# Altium PCB CH32V305F-R0-1v0.PcbDoc
Units mil, origin at the board's own origin, x right, y up, seen from the top; angles counter-clockwise.
Board outline 1496.06 x 2204.72 mil, 2 copper layers (Top Layer, Bottom Layer); 26 components, 30 nets, 117 pads, 268 vias.
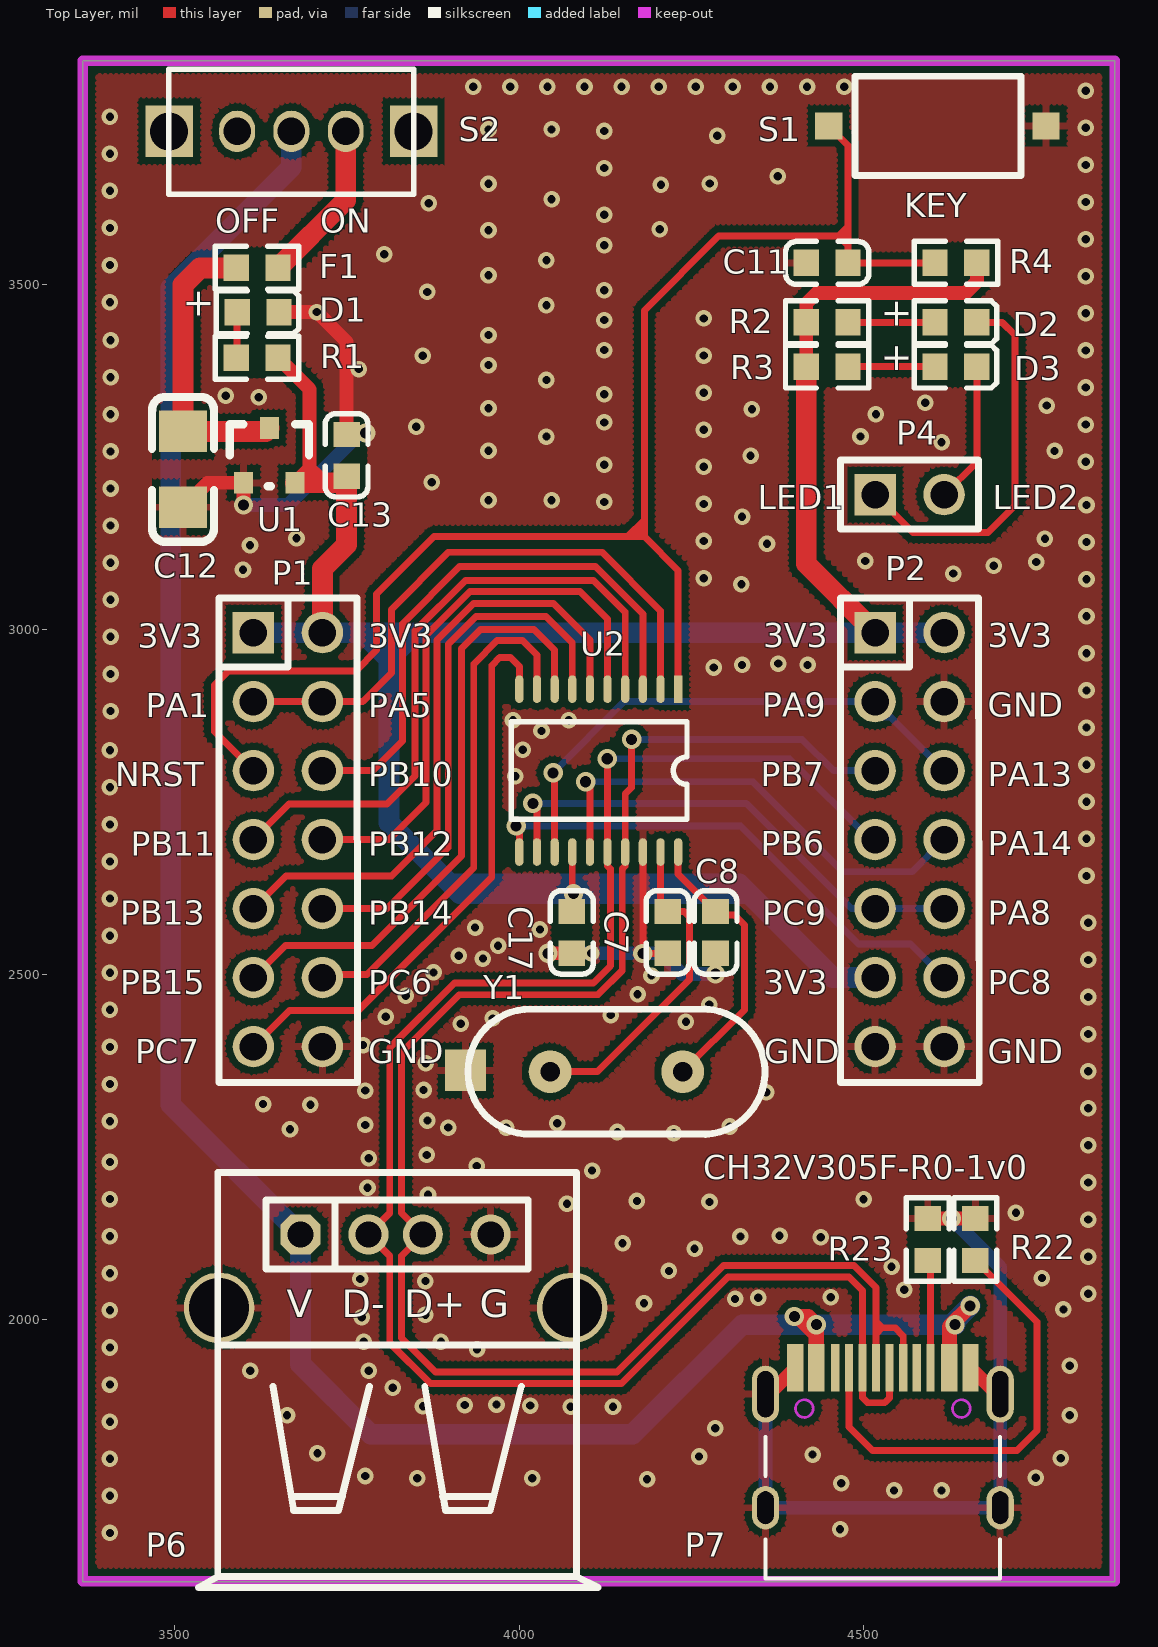
[diagram p0: Top Layer view]
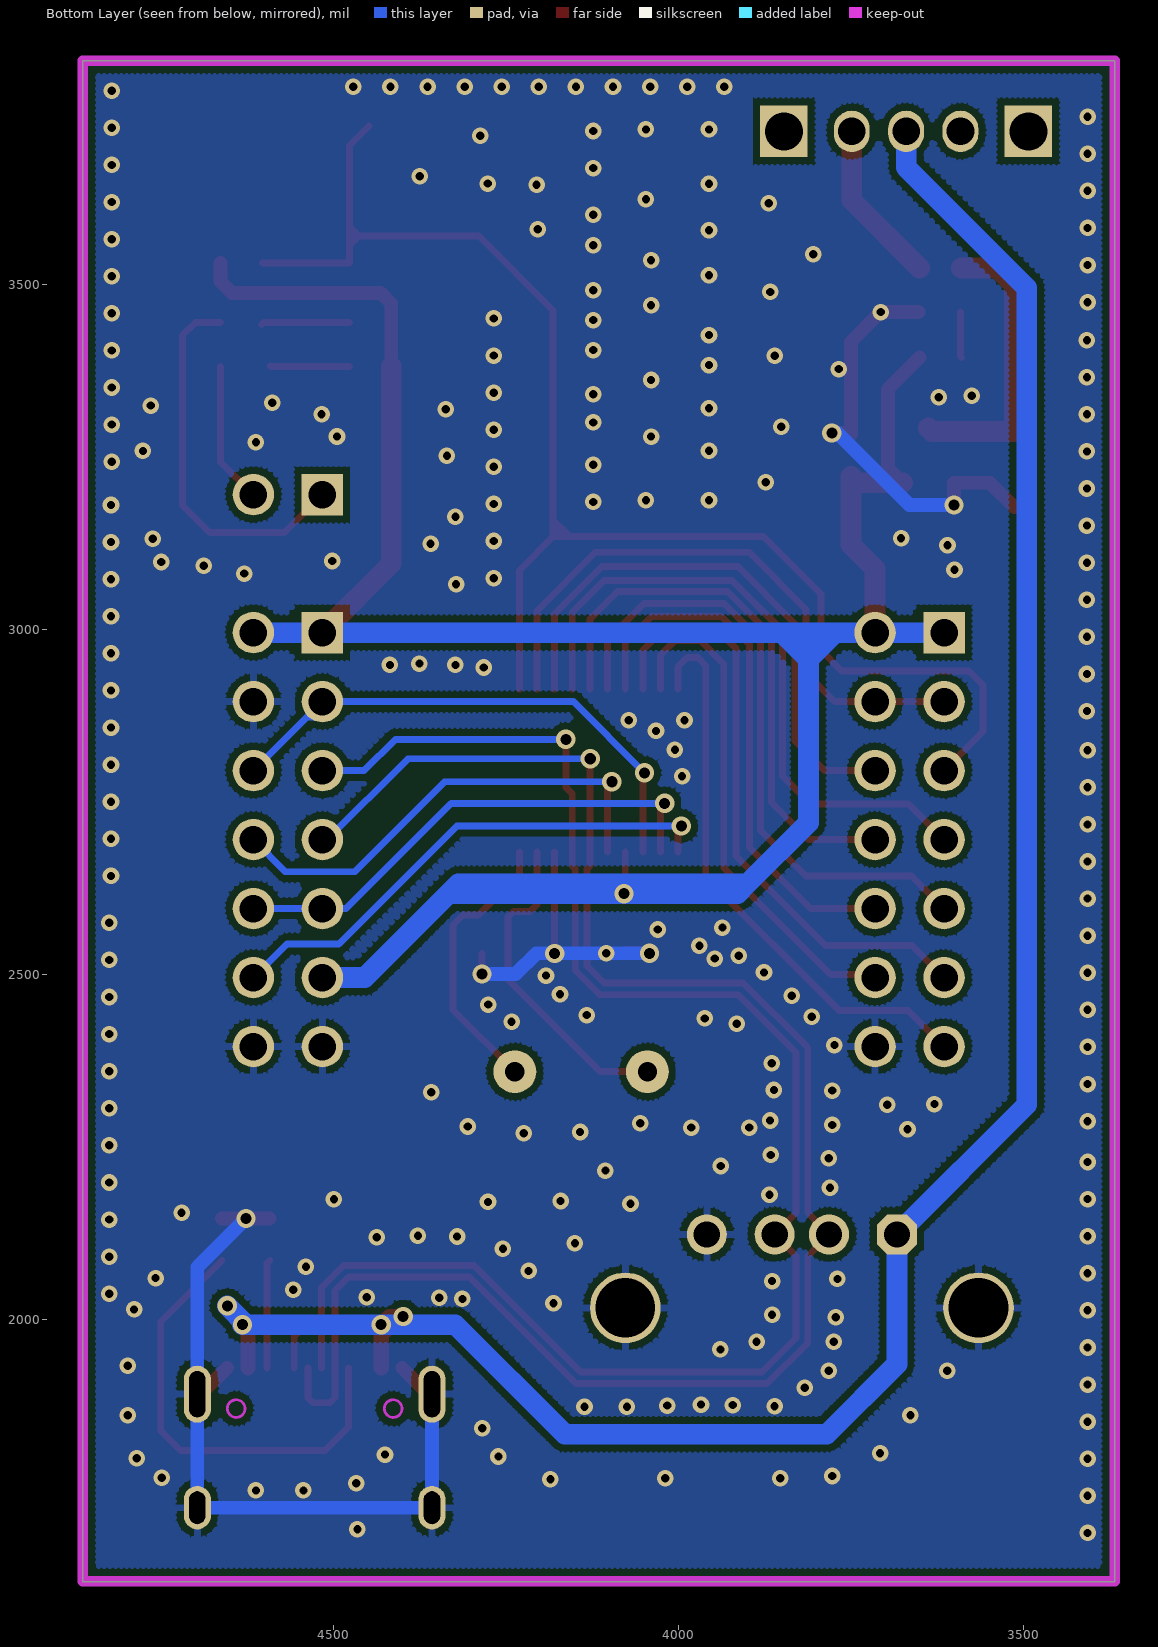
[diagram p1: Bottom Layer view, seen from below]

## Layer stack, top to bottom
Top Solder: solder mask 0.4, Solder Resist, Dk 3.5
Top Layer: signal copper 1.4
Dielectric 1: dielectric 12.6, FR-4, Dk 4.8
Bottom Layer: signal copper 1.4
Bottom Solder: solder mask 0.4, Solder Resist, Dk 3.5

## Board outline
3367.52,1619.63 4863.58,1619.63 4863.58,3824.35 3367.52,3824.35

## Design rules (kind name [scope] priority, off if disabled: settings)
Clearance Clearance_1 [InPolygon] p1: gap=10 ignorepadtopadclearanceinfootprint=FALSE
Clearance [All] p2: gap=6 ignorepadtopadclearanceinfootprint=FALSE
ComponentClearance [All] p1 off: gap=10 collisioncheckmode=3 verticalgap=10 showdistances=FALSE
DiffPairsRouting [All] p1: maxlimit=10 minlimit=7 mostfreqgap=8 toplayer_minwidth=6 toplayer_maxwidth=15 toplayer_prefwidth=8 bottomlayer_minwidth=6 bottomlayer_maxwidth=15 bottomlayer_prefwidth=8 maxuncoupledlength=500
MinimumSolderMaskSliver [All] p1 off: minsoldermaskwidth=10
PolygonConnect PolygonConnect_1 [IsVia] p1: connectstyle=Direct reliefconductorwidth=10 reliefentries=4 polygonreliefangle="90 Angle" airgapwidth=10
PolygonConnect [All] p2: connectstyle=Relief reliefconductorwidth=10 reliefentries=4 polygonreliefangle="90 Angle" airgapwidth=10
RoutingVias [All] p1: holewidth=16 width=28 viastyle="Through Hole" minholewidth=12 minwidth=24 maxholewidth=28 maxwidth=50
SilkToSilkClearance [All] p1 off: silktosilkclearance=10
SilkToSolderMaskClearance [IsPad] p1 off: minsilkscreentomaskgap=10 clearancetoexposedcopper=TRUE
SolderMaskExpansion [All] p1: expansion=4 istentingtop=FALSE
Width [All] p1: maxlimit=100 minlimit=6 preferedwidth=10
25 further rules are at their usual default settings.

## Classes and differential pairs
differential pair NewDifferentialPair1: +PB6 -PB7

## Components (designator, comment, footprint, x,y, rotation, side; value= is the part's Value field where it differs from the comment)
C7 "22pF" 0603_C 4215.34,2530.51 r90 top
C8 "22pF" 0603_C 4284.82,2530.51 r90 top
C11 "0.1uF" 0603_C 4416.37,3531.25 r0 top
C12 "10uF" 3216_C 3513,3287 r90 top
C13 "2.2uF" 0603_C 3750,3282.63 r270 top
C17 "0.1uF" 0603_C 4076.48,2530.51 r90 top value=15pF
D1 "POWER  red" 0603+ 3591.38,3460 r0 top
D2 "LED1" 0603+ 4603,3445 r0 top
D3 "LED2" 0603+ 4603,3381 r0 top
F1 "500mA" 0603 3650.63,3524 r180 top
P1 "HEADER 7x2" IDC14-2.54mm 3615,2995.32 r0 top
P2 "HEADER 7x2" IDC14-2.54mm 4516.1,2995.32 r0 top
P4 "2HEAD" SIP2-2.54mm 4516.1,3195.32 r270 top
P6 "USB_A" USBAF 3683.29,2122.94 r0 top (schematic designator P_HUSB0)
P7 "TYPE-C" TYPE-C-Receptacle-2.0 4527.34,1929.63 r0 top (schematic designator P_HUSB1)
R1 "1K" 0603 3590,3394 r0 top
R2 "1K" 0603 4416.37,3445 r0 top
R3 "1K" 0603 4416.37,3381 r0 top
R4 "10K" 0603 4603,3531.25 r0 top
R22 "NC(5.1K)" 0603 4661.54,2085.36 r90 top
R23 "NC(5.1K)" 0603 4592.36,2085.36 r90 top
S1 "KEY" SMD_6.1x3.65x2.5mm-KEY 4448.82,3729.91 r0 top
S2 "SW" KEY2 3670,3722 r0 top
U1 "6219" SOT-23 3600.6,3212.47 r0 top
U2 "CH32V305F" TSSOP20 4230.7,2913.32 r180 top
Y1 "8M" XT_AT49 4237.15,2358.91 r90 top

## Footprints (in the part's own frame and the unit in brackets; to place one, negate y for a bottom-side part, rotate by r counter-clockwise, add the part's x,y. Pads: shape width x height; smd on the part's side, far side on the other; paste and mask are expansions set on the pad)
0603 [mm]
  rect 0.93x0.98 smd: 1(0,0) 2(1.54,0)
  silkscreen extent -0.76,-0.79 2.3,0.79
0603+ [mm]
  rect 0.93x0.98 smd: 1(0,0) 2(1.54,0)
  silkscreen extent -0.76,-0.79 2.27,0.79
0603_C [mm]
  rect 0.93x0.98 smd: 1(0,0) 2(1.54,0)
  silkscreen extent -0.76,-0.79 2.31,0.79
3216_C [mil]
  rect 60x70 smd: 1(0,0) 2(-110,0)
  silkscreen extent -160,-45 50,45
IDC14-2.54mm [mil]
  rect 60x60 hole 40: 1(0,0)
  round 60 hole 40: 2(100,0) 3(0,-100) 4(100,-100) 5(0,-200) 6(100,-200) 7(0,-300) 8(100,-300) 9(0,-400) 10(100,-400) 11(0,-500) 12(100,-500) 13(0,-600) 14(100,-600)
  silkscreen extent -50,-652 151,50
KEY2 [mm]
  rect 1.75x1.9 hole 1.4: 0(-4.5,0) 0(4.5,0)
  oval 1.321x1.524 hole 1.016: 1(0,0) 2(-2,0) 3(2,0)
  silkscreen extent -4.51,-2.31 4.5,2.29
SIP2-2.54mm [mil]
  rect 60x60 hole 40: 1(0,0)
  round 60 hole 40: 2(0,100)
  silkscreen extent -50,-50 50,150
SMD_6.1x3.65x2.5mm-KEY [mm]
  rect 1x1 smd: 1(0,0) 2(8,0)
  silkscreen extent 0.98,-1.83 7.08,1.83
SOT-23 [mm]
  rect 0.7x0.8 smd: 1(0,0) 2(1.9,0) 3(0.95,2.02)
  silkscreen extent -0.51,-0.13 2.41,2.16
TSSOP20 [mil]
  rect 12x40 smd: 1(0,0)
  oval 12x40 smd: 2(25.6,0) 3(51.2,0) 4(76.8,0) 5(102.4,0) 6(128,0) 7(153.5,0) 8(179.1,0) 9(204.7,0) 10(230.3,0) 11(230.3,236) 12(204.7,236) 13(179.1,236) 14(153.5,236) 15(128,236) 16(102.4,236) 17(76.8,236) 18(51.2,236) 19(25.6,236) 20(0,236)
  silkscreen extent -13,47 242,189
TYPE-C-Receptacle-2.0 [mm]
  oval 1x1.6 hole 0.6 slot 1.2 at 90 deg: 0(-4.32,-5.15) 0(4.32,-5.15)
  oval 1x2.1 hole 0.6 slot 1.7 at 90 deg: 0(-4.32,-0.97) 0(4.32,-0.97)
  rect 0.6x1.75 smd: A1(-3.225,0) A4(-2.45,0) B1(3.225,0) B4(2.45,0)
  rect 0.3x1.75 smd: A5(-1.25,0) A6(-0.25,0) A7(0.25,0) A8(1.25,0) B5(1.75,0) B6(0.75,0) B7(-0.75,0) B8(-1.75,0)
  Keep-Out Layer circle w0.1: c-2.89,-1.5 r0.325
  Keep-Out Layer circle w0.1: c2.89,-1.5 r0.325
  silkscreen extent -4.32,-7.75 4.32,-2.55
USBAF [mm]
  round 2.6 hole 2.2: 0(-3,-2.7) 0(10,-2.7)
  oct 1.473x1.473 hole 0.965: 1(0,0)
  round 1.473 hole 0.965: 2(2.5,0) 3(4.5,0) 4(7,0)
  silkscreen extent -3.75,-12.99 10.95,2.29
XT_AT49 [mil]
  rect 60x60 smd: 0(1.89,314.81)
  round 62 hole 28: 1(0,0) 2(0,192.13)
  silkscreen extent -91,-119 91,311

## Part data
C7 C8 C11 C17: library part Cap, "Capacitor", LatestRevisionDate=17-Jul-2002, LatestRevisionNote="Re-released for DXP Platform.", PackageReference=RAD-0.3, Published=8-Jun-2000, Publisher="Altium Limited"
C12 C13: library part CAP, "Capacitor"
D1 D2 D3: library part LED0, "Typical INFRARED GaAs LED", LatestRevisionDate=08-Jul-2005, LatestRevisionNote="Mech Layer 1 removed.", PackageReference=LED-0, Published=8-Jun-2000, Publisher="Altium Limited"
F1: library part FUSE1, "Fuse"
P1 P2: library part "Header 7X2", "Header, 7-Pin, Dual row"
P6: library part USB, "USB Port"
P7: library part TYPE-C1
R1 R2 R3: library part "Res Semi", "Semiconductor Resistor", LatestRevisionDate=17-Jul-2002, LatestRevisionNote="Re-released for DXP Platform.", PackageReference=AXIAL-0.5, Published=8-Jun-2000, Publisher="Altium Limited"
R4 R22 R23: library part Res2, "Resistor"
  R4: LatestRevisionDate=17-Jul-2002, LatestRevisionNote="Re-released for DXP Platform.", PackageReference=AXIAL-0.4, Published=8-Jun-2000, Publisher="Altium Limited"
U1: library part LM1117_3.3V
U2: "RISC-V FPU HD-MCU, 144MHz, USB_480M, CAN, UART*2, SPI"
Y1: library part XTAL, "Crystal Oscillator", LatestRevisionDate=17-Jul-2002, LatestRevisionNote="Re-released for DXP Platform.", PackageReference=R38, Published=8-Jun-2000, Publisher="Altium Limited"

## Via types
v1: diameter 24, hole 12, Top Layer to Bottom Layer, tented both sides, 251 vias
v2: diameter 28, hole 16, Top Layer to Bottom Layer, tented both sides, 17 vias

## Nets (pads, with @x,y where several pads share a name; then routed paths per layer and width w, separated by ;. In a path a pad name is that pad's centre, name@x,y a point inside that pad or via, vN(x,y) a via of type N, cw(c..) or ccw(c..) an arc to the next point about the centre after c; other vN are vias at no path point)
+5V: P6.1 P7.A4 P7.B4 S2.1 | length 3283.1
  Top Layer w22: v2(4399,2004) v2@4404.36,2004 ; P7.A4 4430.88,1977.48 ; P7.B4 v2@4623.8,1984.15 ; v2(4631.87,1992.22) v2@4623.8,1984.15 ; v2(4653.99,2019.48) 4623.8,1989.29 v2@4623.8,1984.15 ; v2@4404.36,2004 4430.88,1977.48 ; v2@4404.36,2004 4419.11,2004 v2(4430.88,1992.22) 4430.88,1977.48
  Bottom Layer w30: S2.1 3670,3669.83 3495.11,3494.94 3495.11,2311.12 P6.1 3683.29,1935.05 3785.07,1833.28 4164.57,1833.28 4323.52,1992.22 v2(4430.88,1992.22) v2@4626.73,1992.22 ; v2(4631.87,1992.22) v2@4626.73,1992.22 ; v2(4653.99,2019.48) v2@4626.73,1992.22
GND: C7.1 C8.1 C11.1 C12.2 C13.1 C17.1 D1.2 P1.14 P2.4 P2.13 P2.14 P6.0 P6.4 P7.0 P7.A1 P7.B1 R22.2 R23.2 S1.2 U1.1 U2.18 Y1.0 | length 2276.5
  Top Layer w10: U2.18 v2(4179.5,2530.33) 4179.68,2530.51 C7.1 ; v2(4284.82,2500.39) C8.1
  Top Layer w20: C12.2 3548.47,3212.47 U1.1 v2(3600.6,3180.43) ; D1.2 v1(3706.97,3460) 3750,3416.97 C13.1 3752.13,3284.76 v2(3777.75,3284.76) ; v2(4041.93,2530.51) C17.1 ; P7.0@4357.26,1891.44 4362.18,1891.44 P7.A1 ; R23.2 v2(4626.95,2145.99) R22.2 ; P7.B1 4692.5,1891.44 P7.0@4697.42,1891.44
  Bottom Layer w20: v2(3600.6,3180.43) 3665.18,3180.43 3769.51,3284.76 v2(3777.75,3284.76) ; v2(4041.93,2530.51) 4206.05,2530.51 4236.16,2500.39 v2(4284.82,2500.39) ; P7.0@4357.26,1891.44 4357.26,1726.87 4697.42,1726.87 4697.42,1891.44 4697.42,2075.53 v2(4626.95,2145.99)
  other v1: 3407.04,1690.31 4465.34,1695.64 3407.04,1744.08 4543.62,1751.94 4612.46,1751.94 4466.99,1762.33 4185.56,1768.14 3852.38,1769.71 4018.97,1769.71 4748.84,1770.13 3776.94,1772.85 3407.04,1797.85 4785.21,1798.7 4261,1801.14 4425.42,1803.9 3707.79,1805.86 4284.57,1842.01 3407.04,1851.62 3663.79,1860.87 4798.19,1861.05 4074.74,1873.41 4136.2,1873.41 3860.73,1874.15 4016.24,1874.89 3921.45,1875.63 3967.36,1876.37 3817.04,1900.81 3407.04,1905.38 3610.35,1925.3 3782.23,1925.25 4798.19,1932.48 3939.22,1956.35 3407.04,1959.15 3774.83,1967.46 3886.83,1967.45 3771.87,2003 3864.35,2006.56 3407.04,2012.92 4789.1,2014.31 4181.15,2023.18 4313.18,2029.56 4346.82,2031.26 4451.76,2031.81 4825.25,2037.02 4558.57,2042.73 3864.35,2055.45 3769.64,2058.54 4757.93,2059.77 3407.04,2066.68 4217.33,2070.11 4539.99,2075.98 4825.25,2090.78 4254.48,2102.38 4150.06,2110.43 4437.33,2119 3407.04,2120.45 4320.97,2119.98 4377.68,2120.96 4825.25,2144.55 4720.26,2154.59 4069.54,2167.58 4276.05,2170.18 4170.85,2171.47 3407.04,2174.22 4499.46,2174.07 3868.01,2180.38 3780.37,2190.83 4825.25,2198.32 4105.9,2215.64 3938.77,2222.19 3407.04,2227.98 3781.98,2233.45 3866.4,2238.27 4825.25,2252.09 4224.21,2269.63 4142.67,2271.48 3668.01,2275.32 3897.36,2277.89 3981.53,2277.89 4305.4,2279.5 3777.15,2281.69 4055.36,2284.1 3407.04,2287.23 3867.21,2288.12 4825.25,2305.85 3697.56,2310.79 3629,2311.97 4358.31,2329.2 3777.15,2331.54 3861.58,2332.35 3407.04,2341 4825.25,2359.62 3864.8,2370.94 3407.04,2394.77 3773.94,2397.47 4825.25,2413.39 3915.4,2428.39 4241.9,2431.24 3961.94,2436.06 3806.9,2438.48 4132.96,2440.99 3407.04,2448.53 4275.67,2456.17 4825.25,2467.15 3835.85,2469.03 4171.76,2471.04 4192,2498.2 3407.04,2502.3 3876.05,2502.81 4825.25,2520.92 3947.61,2522.91 3912.75,2526.78 4104.77,2530.51 3969.58,2541.53 3407.04,2556.07 4030.23,2565.03 3936.24,2567.76 4825.25,2574.69 3407.04,2609.83 4822.57,2642.7 3407.04,2663.6 4822.57,2696.47 3407.04,2717.37 4822.57,2750.23 3407.04,2771.14 3994.73,2787.16 4822.57,2804 3407.04,2824.9 4005.18,2825.5 4032.57,2852.88 4822.57,2857.77 3991.24,2868.32 4071.9,2868.32 3407.88,2881.63 4822.57,2911.53 3407.88,2935.4 4282.43,2944.75 4323.28,2948.55 4418.29,2948.55 4375.54,2950.45 4822.57,2965.3 3407.88,2989.17 4822.57,3019.07 3407.88,3042.93 4322.33,3065.41 4822.57,3072.83 4267.81,3074.35 4629.3,3080.95 3599.87,3086.38 4688.07,3092.15 3407.88,3096.7 4749.64,3097.74 4501.95,3099.14 3610.04,3121.96 4359.38,3124.31 4822.57,3126.6 4267.81,3128.11 4762.24,3131.33 3677.39,3132.13 3407.88,3150.47 4323.28,3163.26 4822.57,3180.37 4267.81,3181.88 4123.59,3184.77 3955.77,3187.03 4047.19,3187.03 3407.88,3204.23 3873.66,3213.49 4267.81,3235.65 4123.59,3238.54 4821.41,3243.11 4335.63,3251.62 3407.88,3258 3955.77,3259.03 4776.23,3258.67 4612.5,3271.27 4039.68,3279.53 4494.96,3279.66 4267.81,3289.41 3851.2,3293.84 4821.41,3296.87 4123.59,3300.02 3407.88,3311.77 4517.35,3311.85 4337.53,3319.08 3955.77,3320.52 4765.04,3324.44 4588.71,3328.64 3622.65,3336.44 3574.87,3338.51 4123.59,3341.01 4267.81,3343.18 4821.41,3350.64 4039.68,3361.5 3407.88,3365.54 3767.63,3377.41 3955.77,3383.21 3860.55,3396.69 4267.81,3396.95 4821.41,3404.41 4123.59,3404.92 3407.88,3419.3 3955.77,3426.63 4123.59,3448.34 4267.81,3450.71 4821.41,3458.17 4039.68,3470.05 3407.04,3474.35 3866.78,3489.14 4123.59,3491.76 4821.41,3511.94 3955.77,3513.47 3407.04,3528.12 4039.68,3535.18 3804.48,3543.9 4123.59,3556.89 4821.41,3565.71 3955.77,3578.6 4204.16,3580.07 3407.04,3581.89 4123.59,3601.12 3869.3,3617.61 4821.41,3619.47 4047.19,3623.64 3407.04,3635.66 4205.7,3644.65 3955.77,3646.16 4276.44,3646.19 4374.86,3656.96 4123.59,3668.68 4821.41,3673.24 3407.04,3689.42 4287.2,3715.39 4123.59,3722.44 3955.77,3724.7 4047.19,3724.7 4821.41,3727.01 3407.04,3743.19 4821.41,3780.77 3933.57,3786.47 3987.33,3786.47 4041.1,3786.47 4094.87,3786.47 4148.63,3786.47 4202.4,3786.47 4256.17,3786.47 4309.94,3786.47 4363.7,3786.47 4417.47,3786.47 4471.24,3786.47
LED1: D2.2 P4.1 | length 551.7
  Top Layer w10: P4.1 4570.95,3140.47 4679.92,3140.47 4718.99,3179.54 4718.99,3426.43 4700.42,3445 D2.2
LED2: D3.2 P4.2 | length 205.4
  Top Layer w10: P4.2 4663.63,3242.85 D3.2
NetD1_1: D1.1 R1.1 | length 66.6
  Top Layer w10: R1.1 3591.38,3395.38 D1.1
NetD2_1: D2.1 R2.2 | length 128.6
  Top Layer w10: R2.2 4601.31,3445 D2.1@4604.34,3441.96
NetD3_1: D3.1 R3.2 | length 114.7
  Top Layer w10: R3.2 4590.45,3381 D3.1@4591.36,3381.91
NetF1_1: F1.1 S2.3 | length 238.6
  Top Layer w30: F1.1 3748.74,3622.11 S2.3
NetP7_A5: P7.A5 R22.1 | length 667.7
  Top Layer w10: P7.A5 4478.13,1843.99 4512.32,1809.79 4721.62,1809.79 4750.51,1838.69 4750.51,1996.39 R22.1
NetP7_B5: P7.B5 R23.1 | length 157.3
  Top Layer w10: R23.1 4596.24,2081.49 P7.B5
NRST: C11.2 P1.5 R4.1 S1.1 U2.1 | length 2246.4
  Top Layer w10: P1.5 3558.64,2851.69 3558.64,2919.42 3579.19,2939.97 3763.57,2939.97 3793.53,2969.92 3793.53,3051.34 3876.85,3134.66 4157.45,3134.66 ; U2.1 4230.7,3085.62 4181.66,3134.66 ; S1.1 4477,3701.73 4477,3584.02 ; R4.1 C11.2 4477,3556.36 ; 4157.45,3134.66 4167.52,3134.66 ; 4157.45,3134.66 4181.66,3158.88 ; 4167.52,3134.66 4181.66,3134.66 ; 4167.52,3134.66 4181.66,3148.8 ; 4181.66,3134.66 4181.66,3148.8 ; 4181.66,3148.8 4181.66,3158.88 ; 4181.66,3158.88 4181.66,3462.4 4289.46,3570.19 4463.17,3570.19 ; 4463.17,3570.19 4477,3556.36 ; 4463.17,3570.19 4477,3570.19 ; 4463.17,3570.19 4477,3584.02 ; 4477,3556.36 4477,3570.19 ; 4477,3570.19 4477,3584.02
PA1: P1.3 P1.4 U2.2 | length 882.6
  Top Layer w10: P1.3 P1.4 3773.51,2895.32 3815.12,2936.93 3815.12,3029.01 3897.99,3111.88 4120.24,3111.88 4205.1,3027.01 U2.2
PA8: P2.9 P2.10 U2.12 | length 732.3
  Top Layer w10: v2(4019.96,2747.8) 4026,2741.76 U2.12
  Bottom Layer w10: v2(4019.96,2747.8) 4160.65,2747.8 4329.38,2747.8 4481.86,2595.32 P2.9 P2.10
PA9: P2.3 P2.6 U2.13 | length 758.6
  Top Layer w10: v2(4049.37,2792.03) 4049.13,2792.28 4048.7,2791.85 4051.6,2788.95 U2.13
  Bottom Layer w10: v2(4049.37,2792.03) 4049.76,2792.41 4049.76,2792.7 4152.38,2895.32 P2.3 ; P2.3@4516.1,2873.18 4538.24,2873.18 P2.6
PA14: P2.8 U2.15 | length 718.7
  Top Layer w10: v2(4096.52,2779.16) 4102.7,2785.34 U2.15
  Bottom Layer w10: v2@4092.28,2781.64 cw(c4093.01,2781.64) 4093.52,2782.16 v2(4096.52,2779.16) ; v2@4093.52,2779.16 4338.86,2779.16 4469.34,2648.68 4569.46,2648.68 P2.8
PB6: P2.7 P6.2 P7.A7 P7.B7 U2.16 | length 2587.2
  Top Layer w10: v2(4127.87,2812.49) 4127.87,2801.9 4128.3,2801.47 U2.16 4128.3,2657.32 4132.6,2653.02 4132.6,2512.45 4107.62,2487.47 3906.39,2487.47 3812.59,2393.66 3812.59,2153.81 P6.2 3812.59,2092.07 3812.59,1965.88 3871.73,1906.74 4148.77,1906.74 4303.18,2061.15 4478.24,2061.15 4497.81,2041.58 P7.B7 4497.81,1886.3 4505.06,1879.05 4530.13,1879.05 4537.18,1886.1 P7.A7
  Bottom Layer w10: v2(4127.87,2812.49) 4392.13,2812.49 4509.3,2695.32 P2.7
PB7: P2.5 P6.3 P7.A6 P7.B6 U2.17 | length 2538.6
  Top Layer w10: v2(4163.26,2840.63) 4163.26,2770.53 4153.9,2761.18 U2.17 4153.9,2657.32 4149.6,2653.02 4149.6,2505.41 4114.66,2470.47 3913.43,2470.47 3829.59,2386.62 3829.59,2153.81 P6.3 3829.59,2092.07 3829.59,1972.92 3878.77,1923.74 4141.73,1923.74 4296.14,2078.15 4485.28,2078.15 4517.5,2045.93 4517.5,1996.64 ; P7.A6 4517.5,1978.92 ; P7.B6 4556.87,1976.02 4545.11,1987.78 4526.36,1987.78 ; 4517.5,1978.92 4517.5,1987.78 ; 4517.5,1978.92 4526.36,1987.78 ; 4517.5,1987.78 4517.5,1996.64 ; 4517.5,1987.78 4526.36,1987.78 ; 4517.5,1996.64 4526.36,1987.78
  Bottom Layer w10: v2(4163.26,2840.63) 4410.39,2840.63 4455.7,2795.32 P2.5
PB10: P1.6 U2.3 | length 824
  Top Layer w10: P1.6 3788.33,2795.32 3831.12,2838.11 3831.12,3008.14 3913.98,3091 4110.84,3091 4179.5,3022.34 U2.3
PB11: P1.7 U2.4 | length 948.8
  Top Layer w10: P1.7 3666.69,2747.01 3808.87,2747.01 3849.33,2787.47 3849.33,2978.1 3849.33,2998.06 3922.27,3071.01 4108.21,3071.01 4153.9,3025.32 U2.4
PB12: P1.8 U2.5 | length 822.5
  Top Layer w10: P1.8 3811.69,2695.32 3865.33,2748.96 3865.33,2971.47 3865.33,2991.44 3928.9,3055.01 4088.14,3055.01 4128.3,3014.84 U2.5
PB13: P1.9 U2.6 | length 926.1
  Top Layer w10: P1.9 3662.46,2642.79 3815.45,2642.79 3881.33,2708.66 3881.33,2752.95 3881.33,2964.85 3881.33,2984.81 3934.2,3037.68 4049.87,3037.68 4102.7,2984.85 U2.6
PB14: P1.10 U2.7 | length 792.4
  Top Layer w10: P1.10 3808.51,2595.32 3897.33,2684.14 3897.33,2746.32 3897.33,2978.18 3937.61,3018.46 4038.82,3018.46 4077.2,2980.08 U2.7
PB15: P1.11 U2.8 | length 891.2
  Top Layer w10: P1.11 3661.55,2541.88 3786.98,2541.88 3916.73,2671.63 3916.73,2972.57 3944.22,3000.06 4021.72,3000.06 4051.6,2970.18 U2.8
PC6: P1.12 U2.9 | length 744.7
  Top Layer w10: P1.12 3719.58,2499.9 3779.7,2499.9 3876.13,2596.34 3934.41,2654.62 3934.41,2950.05 3968.23,2983.87 4005.13,2983.87 4026,2963 U2.9
PC7: P1.13 U2.10 | length 836.6
  Top Layer w10: P1.13 3667.46,2447.79 3766.93,2447.79 3960.49,2641.35 3960.49,2947.59 3971.97,2959.07 3987.68,2959.07 4000.4,2946.34 U2.10
PC8: P2.12 U2.11 | length 757
  Top Layer w10: v2(3995.89,2715.03) 3995.89,2716.9 cw(c3997.76,2715.03) 4000.4,2715.03 U2.11
  Bottom Layer w10: v2(3995.89,2715.03) 4321.33,2715.03 4492.37,2543.99 4567.44,2543.99 P2.12
PD0: C7.2 U2.19 Y1.2 | length 473.8
  Top Layer w10: Y1.2 4113.64,2358.91 4247.26,2492.53 4247.26,2583.13 4239.25,2591.14 C7.2 4205.1,2601.38 U2.19
PD1: C8.2 U2.20 Y1.1 | length 408.3
  Top Layer w10: U2.20 4230.7,2645.26 4285.43,2590.53 4289.97,2585.99 4312.29,2585.99 4326.69,2571.59 4326.69,2448.45 Y1.1
V5V: C12.1 F1.2 U1.3 | length 426.6
  Top Layer w30: F1.2 3537.63,3524 3513,3499.37 C12.1 3633,3287 U1.3
VCC: C13.2 C17.2 P1.1 P1.2 P2.1 P2.2 P2.11 R1.2 R2.1 R3.1 R4.2 U1.2 U2.14 | length 4064.1
  Top Layer w10: U2.14 4077.2,2618.8 v2(4079,2617)
  Top Layer w20: R1.2 3696.44,3348.19 3696.44,3233.51 ; U1.2@3685.92,3222.99 3696.44,3233.51 ; 3696.44,3212.47 3696.44,3233.51 ; 3718.46,3212.47 3717.48,3212.47 3706.96,3222.99 3696.44,3233.51 ; R3.1@4420.93,3382.99 4416.37,3387.55 R2.1 4416.37,3472.64 4431.47,3487.74 4647.06,3487.74 4663.63,3504.31 R4.2
  Top Layer w30: U1.2 3696.44,3212.47 3717.48,3212.47 3740.47,3212.47 C13.2 3750,3122.83 3715,3087.83 P1.2 ; R3.1 4416.37,3095.06 P2.1
  Bottom Layer w30: P1.1 P1.2 3773.12,2995.32 ; 3859.87,2995.32 3850.02,2995.32 ; P2.11 4454.65,2495.32 4332.98,2617 ; P2.2 P2.1 3850.02,2995.32 ; 3773.12,2995.32 3811.57,2995.32 ; 3773.12,2995.32 3811.57,2956.87 ; 3811.57,2956.87 3850.02,2995.32 ; 3811.57,2956.87 3811.57,2995.32 ; 3811.57,2956.87 3811.57,2719.9 3900.22,2631.25 ; 3811.57,2995.32 3850.02,2995.32 ; 3900.22,2631.25 3914.47,2617 v2(4079,2617) 4318.73,2617 4332.98,2617 ; 3900.22,2631.25 3914.47,2631.25 4079,2631.25 4318.73,2631.25 4332.98,2617
pads on no net: P7.A8 P7.B8 S2.0 S2.2

## Polygon pours and split planes (outlines as drawn)
GND on Bottom Layer "GND" (hatched 90Degree grid 8 track 8, remove dead copper, pour order 1): 3367.52,3824.35 3367.52,1619.63 4863.58,1619.63 4863.58,3824.35
GND on Top Layer "GND" (hatched 90Degree grid 8 track 8, remove dead copper, pour order 0): 3367.52,3824.35 3367.52,1619.63 4863.58,1619.63 4863.58,3824.35

## Keep-outs
Keep-Out Layer:
  lines w15: 3367.52,1620.3 3367.52,3824.35 4863.58,3824.35 4863.58,1620.3 3367.52,1620.3

## Silkscreen, mask and mechanical layers (free items; w line width, h text height)
Top Overlay:
  text "OFF" at 3560,3575 h35
  text "ON" at 3712,3575 h35
  text "LED1" at 4346,3174 h35
  text "LED2" at 4687,3174 h35
  text "3V3" at 4354.32,2974 h35
  text "3V3" at 4679.49,2974 h35
  text "3V3" at 3447.61,2973.35 h35
  text "3V3" at 3781.58,2973.35 h35
  text "PA1" at 3458.94,2872.96 h35
  text "PA5" at 3781.58,2872.96 h35
  text "PA9" at 4352.32,2873.47 h35
  text "GND" at 4679.49,2873.47 h35
  text "NRST" at 3414.62,2772.56 h35
  text "PB10" at 3781.58,2772.56 h35
  text "PB7" at 4350.65,2772.93 h35
  text "PA13" at 4679.49,2772.93 h35
  text "PB11" at 3436.94,2672.16 h35
  text "PB12" at 3781.58,2672.16 h35
  text "PB6" at 4350.65,2672.4 h35
  text "PA14" at 4679.49,2672.4 h35
  text "PB13" at 3421.95,2571.76 h35
  text "PB14" at 3781.58,2571.76 h35
  text "PC9" at 4352.32,2571.87 h35
  text "PA8" at 4679.49,2571.87 h35
  text "PB15" at 3421.95,2471.36 h35
  text "PC6" at 3781.58,2471.36 h35
  text "3V3" at 4354.32,2471.33 h35
  text "PC8" at 4679.49,2471.33 h35
  text "PC7" at 3443.94,2370.96 h35
  text "GND" at 3781.58,2370.96 h35
  text "GND" at 4355.53,2370.8 h35
  text "GND" at 4679.49,2370.8 h35
  text "CH32V305F-R0-1v0" at 4267.34,2202.72 h35
Mechanical 1:
  the board outline again, w10

## Text inside footprints (layer, text, board x,y; h text height)
D1: Top Overlay "+" at 3553.3,3449.01 h40 r90
D2: Top Overlay "+" at 4564.92,3434.01 h40 r90
D3: Top Overlay "+" at 4564.92,3370.01 h40 r90
P6: Top Overlay "G" at 3943.29,2002.94 h40; Top Overlay "V" at 3663.29,2002.94 h40; Top Overlay "D+" at 3833.29,2002.94 h40; Top Overlay "D-" at 3743.29,2002.94 h40